# Altium PCB Motor_Driver_Board_V1.0.PcbDoc
Units mil, origin at the board's own origin, x right, y up, seen from the top; angles counter-clockwise.
Board outline 2765.94 x 1978.53 mil, 2 copper layers (Top Layer, Bottom Layer); 42 components, 25 nets, 114 pads, 98 vias.
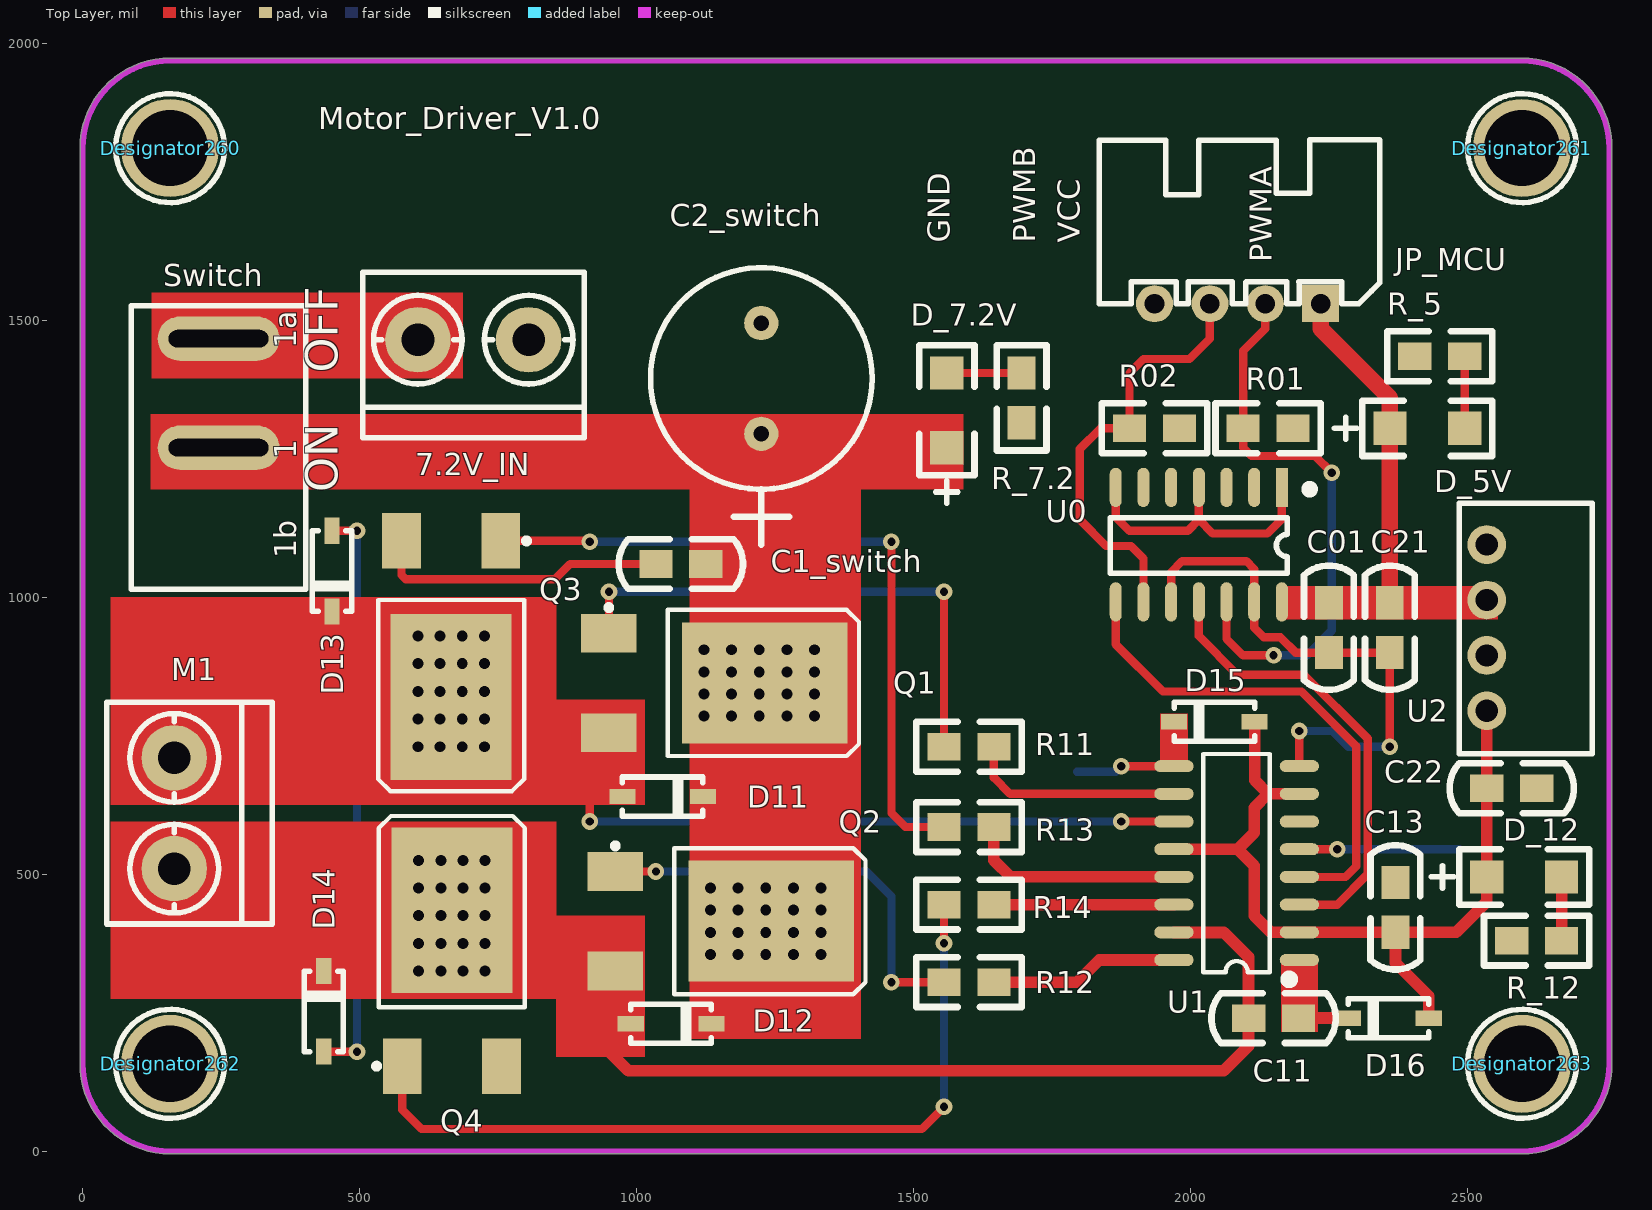
[diagram p0: Top Layer view]
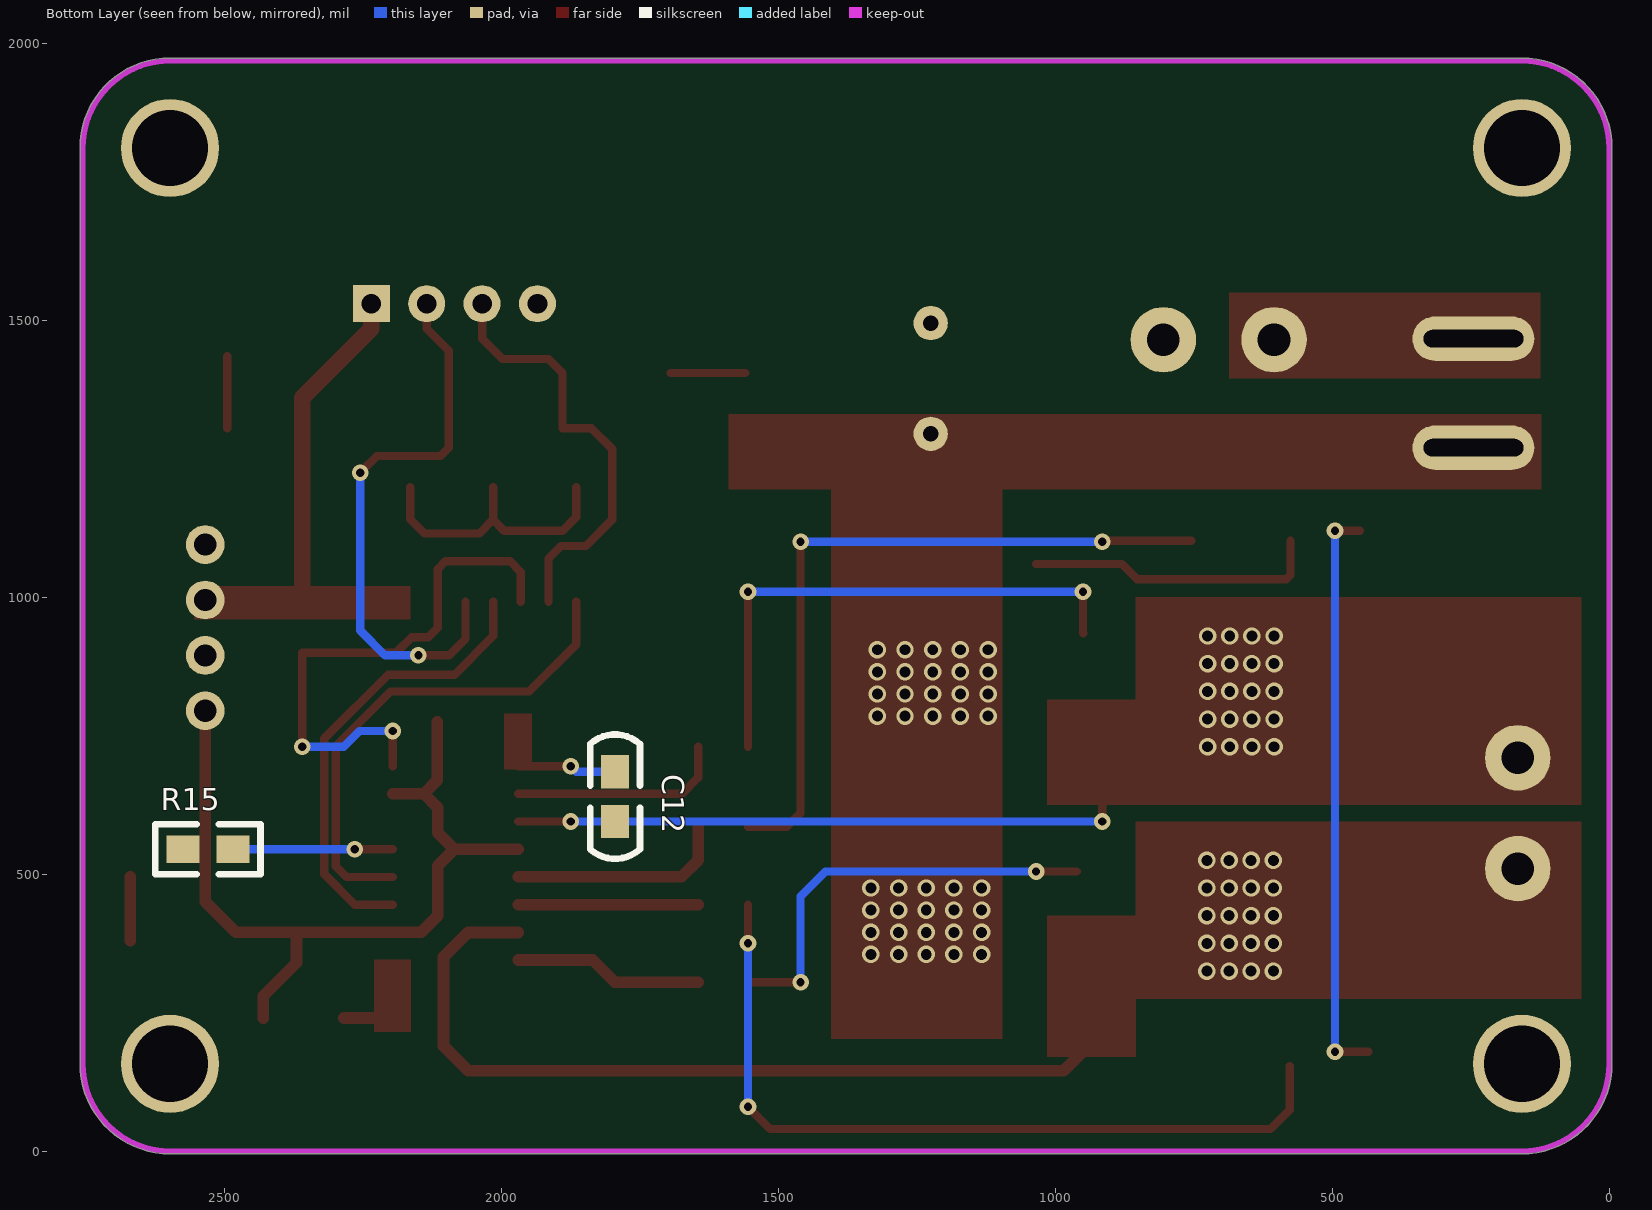
[diagram p1: Bottom Layer view, seen from below]
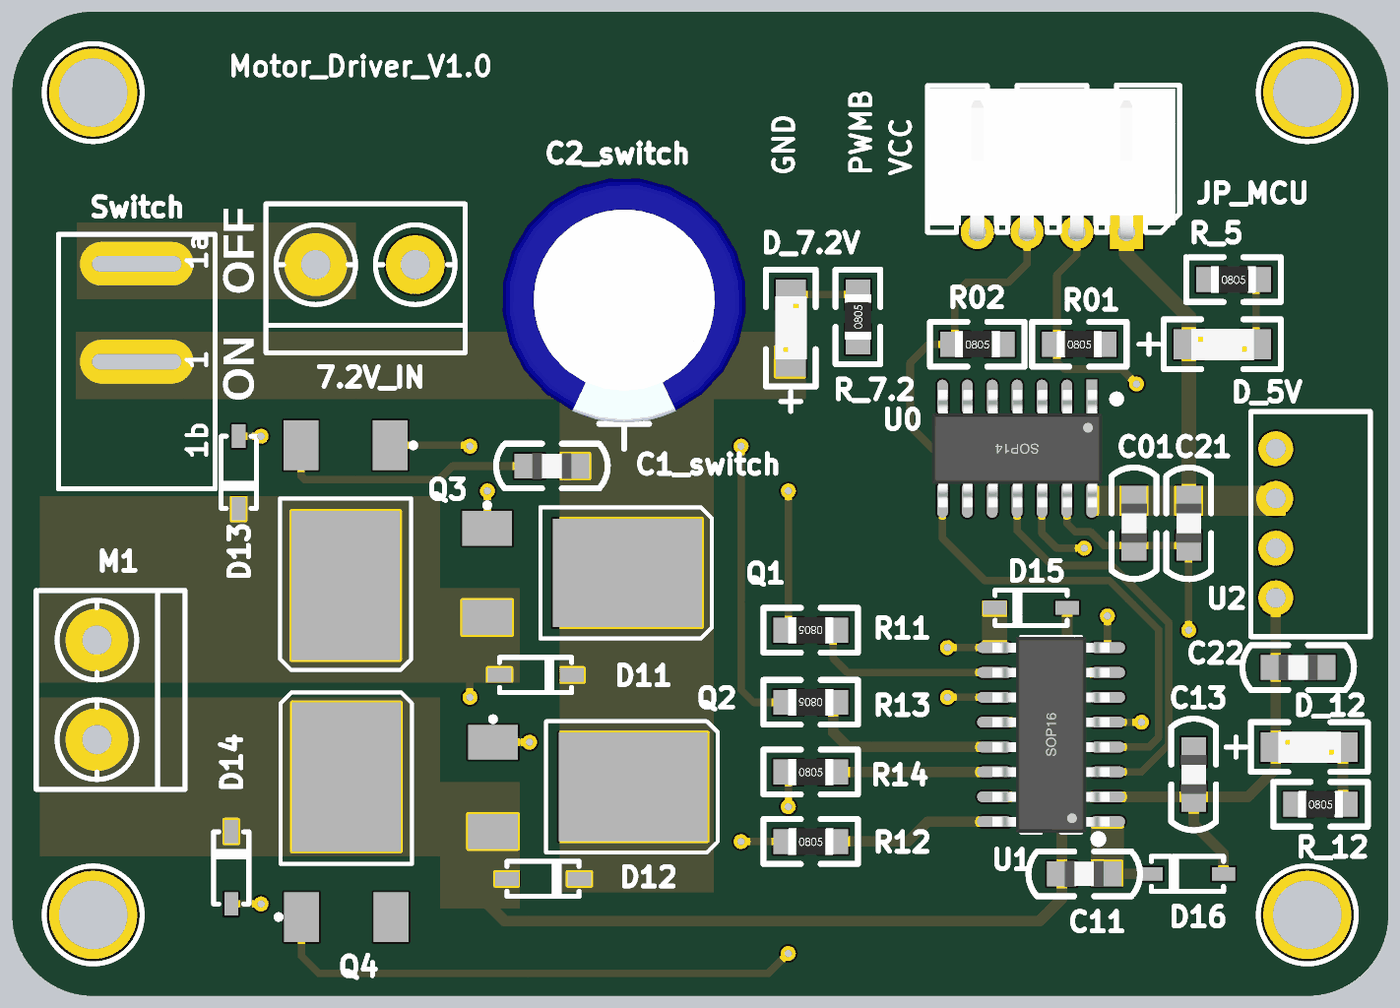
[diagram p2: 3D render of the assembled board from above, using the file's embedded part models]

## Layer stack, top to bottom
Top Solder: solder mask 0.4, Solder Resist, Dk 3.5
Top Layer: signal copper 1.4
Dielectric 1: dielectric 12.6, FR-4, Dk 4.8
Bottom Layer: signal copper 1.4
Bottom Solder: solder mask 0.4, Solder Resist, Dk 3.5

## Board outline
-5.01,157.48 -5.01,1811.77 cw(c0,1811.77) -5.01,1811.93 cw(c157.48,1811.02) 157.48,1973.52 2598.43,1973.52 cw(c2598.43,1811.02) 2760.92,1811.02 2760.92,157.48 cw(c2598.43,157.48) 2598.43,-5.01 157.48,-5.01 cw(c157.48,157.48)

## Design rules (kind name [scope] priority, off if disabled: settings)
Clearance [All] p1: gap=6 ignorepadtopadclearanceinfootprint=FALSE except(25: Arc-Fill Arc-Poly Arc-Region Track-Fill Track-Poly Track-Region SMDPad-Fill SMDPad-Poly SMDPad-Region THPad-Fill THPad-Poly THPad-Region Via-Fill Via-Poly Via-Region Fill-Fill Fill-Poly Fill-Region Poly-Poly Poly-Region Region-Region)
HoleSize [All] p1 off: absolutevalues=TRUE maxlimit=100 minlimit=1 maxpercent=80.000 minpercent=20.000
MinimumSolderMaskSliver [All] p1 off: minsoldermaskwidth=10
PolygonConnect [All] p1: thpad.connectstyle=Direct thpad.reliefconductorwidth=10 thpad.reliefentries=4 thpad.polygonreliefangle="90 Angle" thpad.airgapwidth=10 smdpad.connectstyle=Relief smdpad.reliefconductorwidth=10 smdpad.reliefentries=4 smdpad.polygonreliefangle="90 Angle" smdpad.airgapwidth=10 via.connectstyle=Direct via.reliefconductorwidth=10 via.reliefentries=4 via.polygonreliefangle="90 Angle" via.airgapwidth=10
RoutingVias [All] p1: holewidth=28 width=50 viastyle="Through Hole" minholewidth=28 minwidth=50 maxholewidth=28 maxwidth=50
SilkToSilkClearance [All] p1 off: silktosilkclearance=10
SilkToSolderMaskClearance [IsPad] p1 off: minsilkscreentomaskgap=10 clearancetoexposedcopper=TRUE
SolderMaskExpansion [All] p1: expansion=4
Width VCC_5_12 [InNetClass('VCC_5_12')] p1: maxlimit=50 minlimit=10 preferedwidth=30
Width VCC_7.2 [InNetClass('VCC_7.2')] p2: maxlimit=250 minlimit=10 preferedwidth=200
Width [All] p3: maxlimit=30 minlimit=10 preferedwidth=15
26 further rules are at their usual default settings.

## Classes and differential pairs
component class Motor_Driver_HIP4082_Board_V1.1: 7.2V_IN C01 C1_switch C2_switch C11 C12 C13 C21 C22 D11 D12 D13 D14 D15 D16 D_5V D_7.2V D_12 JP_MCU M1 Q1 Q2 Q3 Q4 R01 R11 R12 R13 R14 R15 R_5 R_7.2 R_12 Switch U0 U1 U2
net class VCC_7.2: 5V 7.2_IN 7.2V 12V
net class VCC_5_12: 5V 12V GND

## Components (designator, comment, footprint, x,y, rotation, side; value= is the part's Value field where it differs from the comment)
7.2V_IN "CON2" KF301-2P 705,1465 r270 top
C01 "100nF" 0805C 2250,900 r90 top
C1_switch "100nF" 0805C 1124.76,1060 r180 top
C2_switch "470uF/50V" RB.2/.4 1225,1295 r270 top
C11 "1uf" 0805C 2195,240 r180 top
C12 "1uf" 0805C 1795,685 r270 bottom
C13 "100nF" 0805C 2370,395 r90 top
C21 "100nF" 0805C 2360,990 r270 top
C22 "100nF" 0805C 2625,655 r180 top
D11 "1N5819" 1N5819 974.33,640 r0 top
D12 "1N5819" 1N5819 989.33,230 r0 top
D13 "1N5819" 1N5819 450,1120 r270 top
D14 "1N5819" 1N5819 435,179.57 r90 top
D15 "1N5819" 1N5819 2115.67,775 r180 top
D16 "1N5819" 1N5819 2430,240 r180 top
D_5V "LED" 1206LED 2360,1305 r0 top
D_7.2V "LED" 1206LED 1560,1270 r90 top
D_12 "LED" 1206LED 2535,495 r0 top
Designator260 "Comment" HOLE-3.5 157.48,1811.02 r270 top
Designator261 "Comment" HOLE-3.5 2598.43,1811.02 r270 top
Designator262 "Comment" HOLE-3.5 157.48,157.48 r270 top
Designator263 "Comment" HOLE-3.5 2598.43,157.48 r270 top
JP_MCU "HDR-1X4" XH2.54-WI-4P 2085,1530 r180 top
M1 "Motor" KF301-2P 165,610 r0 top
Q1 "IR7843" LR7843 1091.4,845.24 r180 top
Q2 "IR7843" LR7843 1103.07,415 r180 top
Q3 "IR7843" LR7843 665,960 r90 top
Q4 "IR7843" LR7843 666.34,295 r270 top
R01 "10K" 0805 2095,1305 r0 top
R02 "10K" 0805 1890,1305 r0 top
R11 "20" 0805 1645,730 r180 top
R12 "20" 0805 1555,305 r0 top
R13 "20" 0805 1645,585 r180 top
R14 "20" 0805 1555,445 r0 top
R15 "10K" 0805 2575,545 r180 bottom
R_5 "1K" 0805 2405,1435 r0 top
R_7.2 "2K" 0805 1695,1315 r90 top
R_12 "3.3K" 0805 2580,380 r0 top
Switch "Header 2" SWITCH-MINI 245,1270 r90 top
U0 "SN74HC125" SOP14_N 2015,1095 r270 top
U1 "HIP4082" SOP16_N 2083.27,520 r180 top
U2 "B0512-1W" SIP4_B_S-1W 2485,717 r0 top

## Footprints (in the part's own frame and the unit in brackets; to place one, negate y for a bottom-side part, rotate by r counter-clockwise, add the part's x,y. Pads: shape width x height; smd on the part's side, far side on the other; paste and mask are expansions set on the pad)
1N5819 [mm]
  rect 1.2x0.7 smd: 1(0,0) 2(3.7,0)
  silkscreen extent 0,-0.9 3.68,0.9
0805 [mil]
  rect 60x50 smd: 1(0,0) 2(90,0)
  silkscreen extent -50,-45 140,45, body extent 0,-27 90,27, height 30
0805C [mil]
  rect 60x50 smd: 1(0,0) 2(90,0)
  silkscreen extent -67,-45 157,45, body extent 6,-26 84,26, height 29
1206LED [mil]
  rect 60x60 smd: A(0,0) K(135,0)
  silkscreen extent -100,-50 185,50, body extent 5,-32 131,31, height 44
HOLE-3.5 [mm]
  round 4.5 hole 3.5: 0(0,0)
  silkscreen extent -2.5,-2.5 2.5,2.5
KF301-2P [mm]
  round 3 hole 1.5: 1(0,-2.54) 2(0,2.54)
  silkscreen extent -3.1,-5.08 4.5,5.08
LR7843 [mm]
  rect 7.6x5.55 smd: 1(-3.556,0)
  rect 2.54x1.778 smd: 2(3.6,-2.28) 3(3.6,2.28)
  silkscreen extent -7.87,-3.58 3.72,3.35
RB.2/.4 [mil]
  round 62 hole 28: 1(0,0) 2(-200,0)
  silkscreen extent -300,-200 200,200, body extent -345,-246 147,246, height 986
SIP4_B_S-1W [mil]
  round 70 hole 40: 1(50,378) 2(50,278) 3(50,178) 4(50,78)
  silkscreen extent 0,0 240,453
SOP14_N [mm] "8.7*6.2*1.8mm（长宽高）"
  rect 1.8x0.55 smd: 1(-2.625,3.81)
  oval 1.8x0.55 smd: 2(-2.625,2.54) 3(-2.625,1.27) 4(-2.625,0) 5(-2.625,-1.27) 6(-2.625,-2.54) 7(-2.625,-3.81) 8(2.625,-3.81) 9(2.625,-2.54) 10(2.625,-1.27) 11(2.625,0) 12(2.625,1.27) 13(2.625,2.54) 14(2.625,3.81)
  silkscreen extent -2.67,-4.06 1.31,5.21, body extent -3,-4.35 3,4.35, height 1.9
SOP16_N [mm] "10.3*6.2*1.8mm（长宽高）封装库来自淘宝卖家 ID：黄晶宝石"
  oval 1.8x0.55 smd: 1(-2.877,4.445) 2(-2.877,3.175) 3(-2.877,1.905) 4(-2.877,0.635) 5(-2.877,-0.635) 6(-2.877,-1.905) 7(-2.877,-3.175) 8(-2.877,-4.445) 9(2.877,-4.445) 10(2.877,-3.175) 11(2.877,-1.905) 12(2.877,-0.635) 13(2.877,0.635) 14(2.877,1.905) 15(2.877,3.175) 16(2.877,4.445)
  silkscreen extent -2.57,-5 1.52,5.49, body extent -3,-5 3,5, height 1.9
SWITCH-MINI [mil]
  oval 80x220 hole 31.5 slot 180 at 90 deg: 1(0,0) 2(196.85,0)
  silkscreen extent -256,-157 256,157
XH2.54-WI-4P [mm] "接插件，4P"
  rect 1.7x1.7 hole 0.9: 1(-3.81,0)
  round 1.7 hole 0.9: 2(-1.27,0) 3(1.27,0) 4(3.81,0)
  silkscreen extent -6.53,-7.53 6.35,0, body extent -6.31,-7.35 6.31,0.35, height 5.73

## Part data
7.2V_IN: "Connector"
C01 C1_switch C11 C12 C13 C21 C22: library part CAP, "Capacitor"
C2_switch: library part CAPACITOR, "Capacitor"
D11 D12 D13 D14 D15 D16: library part Diode, "Default Diode", Code_JEDEC=DO-214-AB, LatestRevisionDate=17-Jul-2002, LatestRevisionNote="Re-released for DXP Platform.", PackageDescription="DO-214-AB/SMC; 2 C-Bend Leads; Body 7.9 x 5.9 mm, inc. leads (LxW)", PackageReference=SMC, PackageVersion=Sep-1996, Published=8-Jun-2000, Publisher="Altium Limited"
JP_MCU: library part "Header 4", "4P接插件", 学习资源=https://shop46360144
M1: library part METER
Q1 Q2 Q3 Q4: library part MOSFET-N, "N-Channel MOSFET", LatestRevisionDate=17-Jul-2002, LatestRevisionNote="Re-released for DXP Platform.", PackageDescription="TO, Flat Index; 3 In-Line, Axial Leads; Body Dia. 4.6mm; Lead Dia. 0.5 mm (max)", PackageReference=E3, PackageVersion=1995/1996, Published=8-Jun-2000, Publisher="Altium Limited"
R01 R02 R11 R12 R13 R14 R15 R_5 R_7.2 R_12: library part RES
Switch: "Header, 2-Pin", LatestRevisionDate=17-Jul-2002, LatestRevisionNote="Re-released for DXP Platform.", Publisher="Altium Limited"
U0: library part SN74LVC125
U2: library part "4 HEADER", "4 Pin Header"

## Via types
v1: diameter 31.5, hole 19.68, Top Layer to Bottom Layer, 80 vias
v2: diameter 30, hole 15, Top Layer to Bottom Layer, 18 vias

## Nets (pads, with @x,y where several pads share a name; then routed paths per layer and width w, separated by ;. In a path a pad name is that pad's centre, name@x,y a point inside that pad or via, vN(x,y) a via of type N, cw(c..) or ccw(c..) an arc to the next point about the centre after c; other vN are vias at no path point)
5V: C01.2 C21.1 D_5V.A JP_MCU.1 U0.14 U2.2 | length 591.8
  Top Layer w30: JP_MCU.1 2235,1485 2360,1360 D_5V.A C21.1
7.2_IN: 7.2V_IN.1 Switch.2
7.2V: C1_switch.1 C2_switch.1 D11.2 D12.2 D_7.2V.A Q1.1 Q2.1 Switch.1
  other v1: 1133.07,355 1183.07,355 1233.07,355 1283.07,355 1333.07,355 1133.07,395 1183.07,395 1233.07,395 1283.07,395 1333.07,395 1133.07,435 1183.07,435 1233.07,435 1283.07,435 1333.07,435 1133.07,475 1183.07,475 1233.07,475 1283.07,475 1333.07,475 1121.4,785.24 1171.4,785.24 1221.4,785.24 1271.4,785.24 1321.4,785.24 1121.4,825.24 1171.4,825.24 1221.4,825.24 1271.4,825.24 1321.4,825.24 1121.4,865.24 1171.4,865.24 1221.4,865.24 1271.4,865.24 1321.4,865.24 1121.4,905.24 1171.4,905.24 1221.4,905.24 1271.4,905.24 1321.4,905.24
12V: C13.1 C22.2 D15.1 D16.1 D_12.A U1.2 U1.7 U1.12 U2.4 | length 1546.9
  Top Layer w21: U1.12 2085,545 ; D15.1 2115.67,669.33 2140,645 ; U1.7 2140,645 ; D16.1 2430,280 2370,340 C13.1 ; U2.4 C22.2 D_12.A 2535,450 2480,395 C13.1 ; 2085,545 2115,515 2115,425 2145,395 U1.2 C13.1 ; 2085,545 2115,575 2115,620 2140,645
AHO1: R11.1 U1.10 | length 392.8
  Top Layer w15: R11.1 1645,674.33 1674.33,645 U1.10
ALO1: R13.1 U1.13 | length 397.4
  Top Layer w21: R13.1 1645,525 1675,495 U1.13
BHO1: R12.2 U1.16 | length 341.6
  Top Layer w21: R12.2 1795,305 1835,345 U1.16
BLO1: R14.2 U1.14 | length 325
  Top Layer w21: R14.2 U1.14
GND: 7.2V_IN.2 C01.1 C1_switch.2 C2_switch.2 C13.2 C21.2 C22.1 D13.1 D14.1 JP_MCU.4 Q3.3 Q4.3 R01.2 R02.2 R15.1 R_5.1 R_7.2.1 R_12.1 U0.1 U0.4 U0.7 U0.10 U0.13 U1.6 U1.8 U2.1 U2.3 | length 3085.3
  Top Layer w15: D14.1 v2(495,179.57) ; D13.1 v2(495,1120) ; Q3.3 575.24,1040.24 582.97,1032.5 852.5,1032.5 880,1060 C1_switch.2 ; U0.7 1865,1145 1890,1120 1995,1120 2015,1140 ; U0.10 1965,1045 1985,1065 2100.67,1065 2115,1050.67 U0.13 2115,945 2132.5,927.5 2162.5,927.5 2190,900 C01.1 C21.2 v2(2360,730) ; U0.4 2015,1140 ; U0.1 2165,1141.34 2138.66,1115 2040,1115 2015,1140 ; U1.8 v2(2196.54,758.46)
  Bottom Layer w15: v2(495,179.57) v2(495,1120) ; v2(2196.54,758.46) 2256.54,758.46 2285,730 v2(2360,730)
MA1: C12.2 D11.1 D13.2 M1.2 Q1.3 Q3.1 U1.11 | length 1239.2
  Top Layer w15: v2(915,595) 915,713.66 Q1.3@961.34,760 ; v2(1875,595) U1.11
  Bottom Layer w15: v2(915,595) C12.2 v2(1875,595)
  other v1: 605,730 645,730 685,730 725,730 605,780 645,780 685,780 725,780 605,830 645,830 685,830 725,830 605,880 645,880 685,880 725,880 605,930 645,930 685,930 725,930
MB1: C11.2 D12.1 D14.2 M1.1 Q2.3 Q4.1 U1.15 | length 1651.7
  Top Layer w21.6: Q2.3 950,313.9 950,180 985,145 2060,145 2105,190 C11.2 2105,350 2060,395 U1.15
  other v1: 606.34,325 646.34,325 686.34,325 726.34,325 606.34,375 646.34,375 686.34,375 726.34,375 606.34,425 646.34,425 686.34,425 726.34,425 606.34,475 646.34,475 686.34,475 726.34,475 606.34,525 646.34,525 686.34,525 726.34,525
Motor_PWMA: U0.8 U1.4 | length 914.2
  Top Layer w15: U0.8 1865,915 1950.24,829.76 2200.24,829.76 2299,731 2299,514 2280,495 U1.4
Motor_PWMB: U0.11 U1.3 | length 834.5
  Top Layer w15: U0.11 2015,930 2085,860 2205,860 2320,745 2320,500 2265,445 U1.3
NetC11_1: C11.1 D16.2 U1.1 | length 89.3
  Top Layer w21.6: C11.1 D16.2
NetC12_1: C12.1 D15.2 U1.9 | length 179.1
  Top Layer w15: v2(1875,695) U1.9
  Bottom Layer w15: C12.1 1865,685 v2(1875,695)
NetD_5V_K: D_5V.K R_5.2 | length 130
  Top Layer w15: D_5V.K R_5.2
NetD_7.2V_K: D_7.2V.K R_7.2.2 | length 135
  Top Layer w15: D_7.2V.K R_7.2.2
NetD_12_K: D_12.K R_12.2 | length 115
  Top Layer w21: R_12.2 D_12.K
NetQ1_2: Q1.2 R11.2 | length 960.1
  Top Layer w15: Q1.2 950,935.34 v2(950,1010) ; R11.2 v2(1555,1010)
  Bottom Layer w15: v2(950,1010) v2(1555,1010)
NetQ2_2: Q2.2 R12.1 | length 767.2
  Top Layer w15: Q2.2 v2(1034.76,504.76) ; v2(1460,305) R12.1
  Bottom Layer w15: v2(1034.76,504.76) 1415.24,504.76 1460,460 v2(1460,305)
NetQ3_2: Q3.2 R13.2 | length 1301.3
  Top Layer w15: Q3.2 913.27,1101.73 v2(915,1100) ; v2(1460,1100) 1460,610 1485,585 R13.2
  Bottom Layer w15: v2(915,1100) v2(1460,1100)
NetQ4_2: Q4.2 R14.1 | length 1452.9
  Top Layer w15: Q4.2 576.58,74.76 611.34,40 1515,40 v2(1555,80) ; v2(1555,375) R14.1
  Bottom Layer w15: v2(1555,80) v2(1555,375)
NetR15_2: R15.2 U1.5 | length 288.5
  Top Layer w15: U1.5 v2(2265,545)
  Bottom Layer w15: v2(2265,545) R15.2
PWMA: JP_MCU.3 R02.1 U0.9 | length 789.1
  Top Layer w15: U0.9 1915,1070 1892.5,1092.5 1847.5,1092.5 1800,1140 1800,1267.5 1837.5,1305 R02.1 1890,1405 1915,1430 1998.15,1430 2035,1466.85 JP_MCU.3
PWMB: JP_MCU.2 R01.1 U0.12 | length 1027.9
  Top Layer w15: U0.12 2065,925 2095,895 v2(2150,895) ; JP_MCU.2 2135,1485 2095,1445 R01.1 2095,1270 2110,1255 2225,1255 v2(2255,1225)
  Bottom Layer w15: v2(2150,895) 2210,895 2255,940 v2(2255,1225)
pads on no net: Designator260.0 Designator261.0 Designator262.0 Designator263.0 U0.2 U0.3 U0.5 U0.6

## Keep-outs
Keep-Out Layer:
  lines w10: 0,157.48 ccw(c157.48,157.48) 157.48,0 2598.43,0 ccw(c2598.43,157.48) 2755.91,157.48 2755.91,1811.02 ccw(c2598.43,1811.02) 2598.43,1968.5 157.48,1968.5 ccw(c157.48,1811.02) 0,1811.02 0,157.48
Mechanical 1:
  lines w10: 157.48,0 2598.43,0 ; 157.48,1968.5 2598.43,1968.5

## Other copper
Top Layer:
  rectangle net 7.2V: 1095,202.48 1405,1240
  region net 7.2_IN: 685.67,1395 685.67,1550 124.33,1550 124.33,1395
  region net MA1: 50,625 855,625 855,1000 50,1000
  region net MB1: 50,595 550,595 550,275 50,275
  region net MB1: 855,170 1015,170 1015,365 855,365
  region net 5V: 2165,1020 2555,1020 2555,960 2165,960
  region net NetC11_1: 2163.66,345 2230,345 2230,215 2163.66,215
  region net NetC12_1: 1995,789.76 1995,689.2 1945,689.2 1945,789.76
  region net MB1: 1015,275 550,275 550,595 855,595 855,425 1015,425
  region net MA1: 1015,815 825,815 825,1000 550,1000 655,895 655,625 1015,625
  region net 7.2V: 122.5,1330 122.5,1195 1590,1195 1590,1330

## Silkscreen, mask and mechanical layers (free items; w line width, h text height)
Top Overlay:
  text "Motor_Driver_V1.0" at 425,1845 h40
  text "GND" at 1565,1640 h40 r90
  text "PWMB" at 1720,1640 h40 r90
  text "VCC" at 1800,1640 h40 r90
  text "PWMA" at 2146.46,1605 h40 r90
  text "OFF" at 480,1405 h100 r90
  text "ON" at 480,1190 h100 r90
Mechanical 1:
  lines w10: 0,157.48 ccw(c157.48,157.48) 157.48,0 ; 0,158.23 0,1811.77 ; 0,1811.02 cw(c157.48,1811.02) 157.48,1968.5 ; 2598.43,0 ccw(c2598.43,157.48) 2755.91,157.48 2755.91,1811.02 ccw(c2598.43,1811.02) 2598.43,1968.5

## Text inside footprints (layer, text, board x,y; h text height)
Switch: Top Overlay "1a" at 385,1450 h39.37 r90; Top Overlay "1" at 385,1250 h39.37 r90; Top Overlay "1b" at 385,1070 h39.37 r90